# EAGLE board CT_schematic (EAGLE 7.6.0)

Size 100 x 80 mm. Coordinates in mm from the lower left corner, seen from the top.
Outline: 0,0 100,0 100,80 0,80 0,0
Copper layers (1*16): Top 0.035mm / dielectric 1.5mm / Bottom 0.035mm
Design rules "default": minimum track width 10mil, minimum drill 24mil, track to track 8mil, track to pad 8mil, pad to pad 8mil, via to via 8mil, smd to smd 8mil, copper to edge 40mil, drill to drill 8mil, minimum pad ring 10mil, minimum via ring 8mil, stop-mask expansion 4mil, vias tented up to drill 0mil, thermal gap 10mil

## Footprints (pad centres in the part's own frame; a part is rotated, then mirrored left to right if it is on the bottom)
C0603 = smd 0.8 x 0.8: 1 -0.762,0; 2 0.762,0
C0402 = smd 0.5 x 0.5: 1 -0.508,0; 2 0.508,0
C0805 = smd 1.2 x 1.3: 1 -1.016,0; 2 1.016,0
C1206 = smd 1.3 x 1.6: 1 -1.524,0; 2 1.524,0
L0603 = smd 0.8 x 0.8: 1 -0.762,0; 2 0.762,0
DR1040 = smd 1.6 x 3.2: 1 -4.458,0; 2 4.458,0
R0603 = smd 0.8 x 0.8: 1 -0.762,0; 2 0.762,0
LQFP100 = smd 0.3 x 1.2: 1 -6,-7.75; 2 -5.5,-7.75; 3 -5,-7.75; 4 -4.5,-7.75; 5 -4,-7.75; 6 -3.5,-7.75; 7 -3,-7.75; 8 -2.5,-7.75; 9 -2,-7.75; 10 -1.5,-7.75; 11 -1,-7.75; 12 -0.5,-7.75; 13 0,-7.75; 14 0.5,-7.75; 15 1,-7.75; 16 1.5,-7.75; 17 2,-7.75; 18 2.5,-7.75; 19 3,-7.75; 20 3.5,-7.75; 21 4,-7.75; 22 4.5,-7.75; 23 5,-7.75; 24 5.5,-7.75; 25 6,-7.75; 51 6,7.75; 52 5.5,7.75; 53 5,7.75; 54 4.5,7.75; 55 4,7.75; 56 3.5,7.75; 57 3,7.75; 58 2.5,7.75; 59 2,7.75; 60 1.5,7.75; 61 1,7.75; 62 0.5,7.75; 63 0,7.75; 64 -0.5,7.75; 65 -1,7.75; 66 -1.5,7.75; 67 -2,7.75; 68 -2.5,7.75; 69 -3,7.75; 70 -3.5,7.75; 71 -4,7.75; 72 -4.5,7.75; 73 -5,7.75; 74 -5.5,7.75; 75 -6,7.75 | smd 1.2 x 0.3: 26 7.75,-6; 27 7.75,-5.5; 28 7.75,-5; 29 7.75,-4.5; 30 7.75,-4; 31 7.75,-3.5; 32 7.75,-3; 33 7.75,-2.5; 34 7.75,-2; 35 7.75,-1.5; 36 7.75,-1; 37 7.75,-0.5; 38 7.75,0; 39 7.75,0.5; 40 7.75,1; 41 7.75,1.5; 42 7.75,2; 43 7.75,2.5; 44 7.75,3; 45 7.75,3.5; 46 7.75,4; 47 7.75,4.5; 48 7.75,5; 49 7.75,5.5; 50 7.75,6; 76 -7.75,6; 77 -7.75,5.5; 78 -7.75,5; 79 -7.75,4.5; 80 -7.75,4; 81 -7.75,3.5; 82 -7.75,3; 83 -7.75,2.5; 84 -7.75,2; 85 -7.75,1.5; 86 -7.75,1; 87 -7.75,0.5; 88 -7.75,0; 89 -7.75,-0.5; 90 -7.75,-1; 91 -7.75,-1.5; 92 -7.75,-2; 93 -7.75,-2.5; 94 -7.75,-3; 95 -7.75,-3.5; 96 -7.75,-4; 97 -7.75,-4.5; 98 -7.75,-5; 99 -7.75,-5.5; 100 -7.75,-6
ABS07-32.768KHZ-7-T = smd 1.1 x 2.4: 1 -2.5,0; 2 0,0
ASFL1 = smd 1.7 x 1.5: 1 -1.27,-1.1; 2 1.27,-1.1; 3 1.27,1.1; 4 -1.27,1.1
TSOT-23-5 = smd 1.3 x 0.62: 1 -1.31,0.95; 2 -1.31,0; 3 -1.31,-0.95; 4 1.31,-0.95; 5 1.31,0.95
DFN8_2X3MC = smd 0.813 x 0.305: 1 -1.398,0.75; 2 -1.398,0.25; 3 -1.398,-0.25; 4 -1.398,-0.75; 5 1.398,-0.75; 6 1.398,-0.25; 7 1.398,0.25; 8 1.398,0.75 | smd 1.753 x 1.549: 9 0,0
JST-2-SMD = smd 1 x 4.6: 1 -1,-3.7; 2 1,-3.7 | smd 1.6 x 3.4: NC1 -3.4,1.5; NC2 3.4,1.5
FCI_10118193-0001LF = smd 0.4 x 1.35: 1 -1.3,2.675; 2 -0.65,2.675; 3 0,2.675; 4 0.65,2.675; 5 1.3,2.675 | smd 1.6 x 1.4: 6 -3.2,2.45; 7 3.2,2.45 | smd 1.9 x 1.9: 8 -1.2,0; 9 1.2,0 | hole 0.5: -3.3,0; 3.3,0
SON-6 = smd 0.55 x 0.3: 1 -0.355,0.5 | smd 0.52 x 0.3: 2 -0.37,0; 3 -0.37,-0.5; 4 0.37,-0.5; 5 0.37,0; 6 0.37,0.5
SW_4-1437565-2 = smd 1.4 x 2.1: 1 -2.23,4.55; 2 -2.23,-4.55; 3 2.23,4.55; 4 2.23,-4.55
LGM67K-G1J2-24-Z = smd 0.8 x 1.4: A -2,0; C 0,0
NC7SZ125M5X = smd 1.3 x 0.7: 1 -1.3,0.95; 2 -1.3,0; 3 -1.3,-0.95; 4 1.3,-0.95; 5 1.3,0.95
DUMMY_PACKAGE_97 = drill 0.3: 1 0,-1; 2 1.5,-1; 3 3,-1

## Placement (x,y rotation side)
C1  1e-06  [C0603]  -48.26,45.72 0 top  (outside the outline)
C2  1e-07  [C0603]  -52.07,45.72 0 top  (outside the outline)
C3  1e-07  [C0603]  -55.88,45.72 0 top  (outside the outline)
C4  1e-07  [C0603]  -15.24,50.8 0 top  (outside the outline)
C5  1e-07  [C0603]  -19.05,50.8 0 top  (outside the outline)
C6  4.7e-06  [C0603]  -44.45,45.72 0 top  (outside the outline)
C7  1e-07  [C0603]  -22.86,50.8 0 top  (outside the outline)
C8  1e-07  [C0603]  -26.67,50.8 0 top  (outside the outline)
C9  1e-07  [C0603]  -30.48,50.8 0 top  (outside the outline)
C10  1e-08  [C0603]  -34.29,50.8 0 top  (outside the outline)
C11  1e-06  [C0603]  -38.1,50.8 0 top  (outside the outline)
C12  1e-11  [C0402]  -15.24,55.88 0 top  (outside the outline)
C13  1e-11  [C0402]  -19.05,55.88 0 top  (outside the outline)
C14  1e-08  [C0402]  -22.86,55.88 0 top  (outside the outline)
C15  1e-05  [C0805]  -34.29,39.37 0 top  (outside the outline)
C16  1e-05  [C0805]  -39.37,39.37 0 top  (outside the outline)
C17  1e-07  [C0402]  -26.67,55.88 0 top  (outside the outline)
C18  1e-05  [C1206]  -16.51,40.64 0 top  (outside the outline)
C19  1e-05  [C1206]  -22.86,40.64 0 top  (outside the outline)
C20  1e-08  [C0402]  -30.48,55.88 0 top  (outside the outline)
F1  240.0  [L0603]  -41.91,50.8 0 top  (outside the outline)
I1  2.5e-06  [DR1040]  -19.05,22.86 0 top  (outside the outline)
R2  1000.0  [R0603]  -45.72,50.8 0 top  (outside the outline)
R4  4700.0  [R0603]  -49.53,50.8 0 top  (outside the outline)
R5  10000.0  [R0603]  -25.4,45.72 0 top  (outside the outline)
R6  220000.0  [R0603]  -57.15,39.37 0 top  (outside the outline)
R7  1000000.0  [R0603]  -52.07,39.37 0 top  (outside the outline)
R8  10000.0  [R0603]  -30.48,45.72 0 top  (outside the outline)
R9  10000.0  [R0603]  -35.56,45.72 0 top  (outside the outline)
R10  9100.0  [R0603]  -53.34,50.8 0 top  (outside the outline)
R11  680000.0  [R0603]  -15.24,45.72 0 top  (outside the outline)
R12  120000.0  [R0603]  -20.32,45.72 0 top  (outside the outline)
R13  2000.0  [R0603]  -57.15,50.8 0 top  (outside the outline)
R14  10000.0  [R0603]  -40.64,45.72 0 top  (outside the outline)
U1  stm32f071vbt7  [LQFP100]  -22.86,8.89 0 top  (outside the outline)
U2  ABS07-32.768KHZ-7-T  [ABS07-32.768KHZ-7-T]  -39.37,31.75 0 top  (outside the outline)
U3  ASFL1-25MHZ-NCS  [ASFL1]  -53.34,22.86 0 top  (outside the outline)
U4  ltc3406es5  [TSOT-23-5]  -44.45,39.37 0 top  (outside the outline)
U5  MCP73831T-2ACI/MC  [DFN8_2X3MC]  -45.72,54.61 0 top  (outside the outline)
U6  S2B-PH-SM4-TB(LF)(SN)  [JST-2-SMD]  -34.29,24.13 0 top  (outside the outline)
U7  10118193-0001LF  [FCI_10118193-0001LF]  -19.05,31.75 0 top  (outside the outline)
U8  TPS3895ADRYR  [SON-6]  -39.37,54.61 0 top  (outside the outline)
U9  4-1437565-2  [SW_4-1437565-2]  -46.99,6.35 0 top  (outside the outline)
U10  Q65110A2395  [LGM67K-G1J2-24-Z]  -48.26,31.75 0 top  (outside the outline)
U11  nc7sz125m5x  [NC7SZ125M5X]  -27.94,39.37 0 top  (outside the outline)
U12  Dummy  [DUMMY_PACKAGE_97]  -36.83,55.88 0 top  (outside the outline)

## Library data of the parts
C1-C20 F1 I1 R2 R4-R14 U1-U12 = circuit_tree

## Nets
CLK_CRYSTAL_U1_8: C12.1 U1.8 U2.1
CLK_CRYSTAL_U1_9: C13.1 U1.9 U2.2
CLK_U1_12: U1.12 U3.3
GND: C1.2 C2.2 C3.2 C4.2 C5.2 C6.2 C7.2 C8.2 C9.2 C10.2 C11.2 C12.2 C13.2 C14.2 C15.2 C16.1 C16.2 C17.2 C18.2 C19.2 C20.2 R2.2 R5.2 R6.2 R10.2 R12.2 R13.2 U1.20 U1.27 U1.49 U1.74 U1.99 U3.2 U4.2 U5.6 U5.9 U6.2 U7.5 U7.6 U7.7 U7.8 U7.9 U8.2 U10.C U11.1 U11.3 U12.1
INPUT_USBPOWER_5V: C18.1 R14.2 U5.1 U5.2 U7.1
NET_U1_14: R4.1 U1.14 U11.4
NET_U1_21: C10.1 C11.1 F1.1 U1.21
NET_U1_94: R5.1 U1.94
NET_U1_97: U10.A
NET_U1_98: U9.3 U9.4
NET_U4_1: U4.1
NET_U4_3: I1.1 U4.3
NET_U4_5: R6.1 R7.1 U4.5
NET_U4_ATNET_3: I1.2 R7.2
NET_U5_5: R14.1 U5.5
NET_U5_8: R13.1 U5.8
NET_U8_1: R9.1 R10.1 U8.1
NET_U8_3: R11.2 R12.1 U8.3
NET_U8_4: R8.1 U8.4 U11.2
NET_U9_1: R2.1 U9.1 U9.2
PROC_TIM1_CH2: U1.42 U12.2
PROC_TIM1_CH4: U1.45 U12.3
VCC_S1_3V7: C15.1 C19.1 U4.4 U5.3 U5.4 U6.1
VCC_TIER1_3V3: C1.1 C2.1 C3.1 C4.1 C5.1 C6.1 C7.1 C8.1 C9.1 C14.1 C16.2 C17.1 C20.1 F1.2 I1.2 R4.2 R7.2 R8.2 R9.2 R11.1 U1.6 U1.28 U1.50 U1.75 U1.100 U3.4 U8.6 U11.5

## Tracks (layer width: path | path; a pad name or v marks a point on that pad's centre or on a via)
CLK_CRYSTAL_U1_8  (2 unrouted)
CLK_CRYSTAL_U1_9  (2 unrouted)
CLK_U1_12  (1 unrouted)
GND  (46 unrouted)
INPUT_USBPOWER_5V  (4 unrouted)
NET_U1_14  (2 unrouted)
NET_U1_21  (3 unrouted)
NET_U1_94  (1 unrouted)
NET_U1_98  (1 unrouted)
NET_U4_3  (1 unrouted)
NET_U4_5  (2 unrouted)
NET_U4_ATNET_3  (1 unrouted)
NET_U5_5  (1 unrouted)
NET_U5_8  (1 unrouted)
NET_U8_1  (2 unrouted)
NET_U8_3  (2 unrouted)
NET_U8_4  (2 unrouted)
NET_U9_1  (2 unrouted)
PROC_TIM1_CH2  (1 unrouted)
PROC_TIM1_CH4  (1 unrouted)
VCC_S1_3V7  (5 unrouted)
VCC_TIER1_3V3  (27 unrouted)